# Altium PCB main_board.PcbDoc
Units mil, origin at the board's own origin, x right, y up, seen from the top; angles counter-clockwise.
Board outline 2900 x 2900 mil, 2 copper layers (Top Layer, Bottom Layer); 61 components, 47 nets, 327 pads, 28 vias.
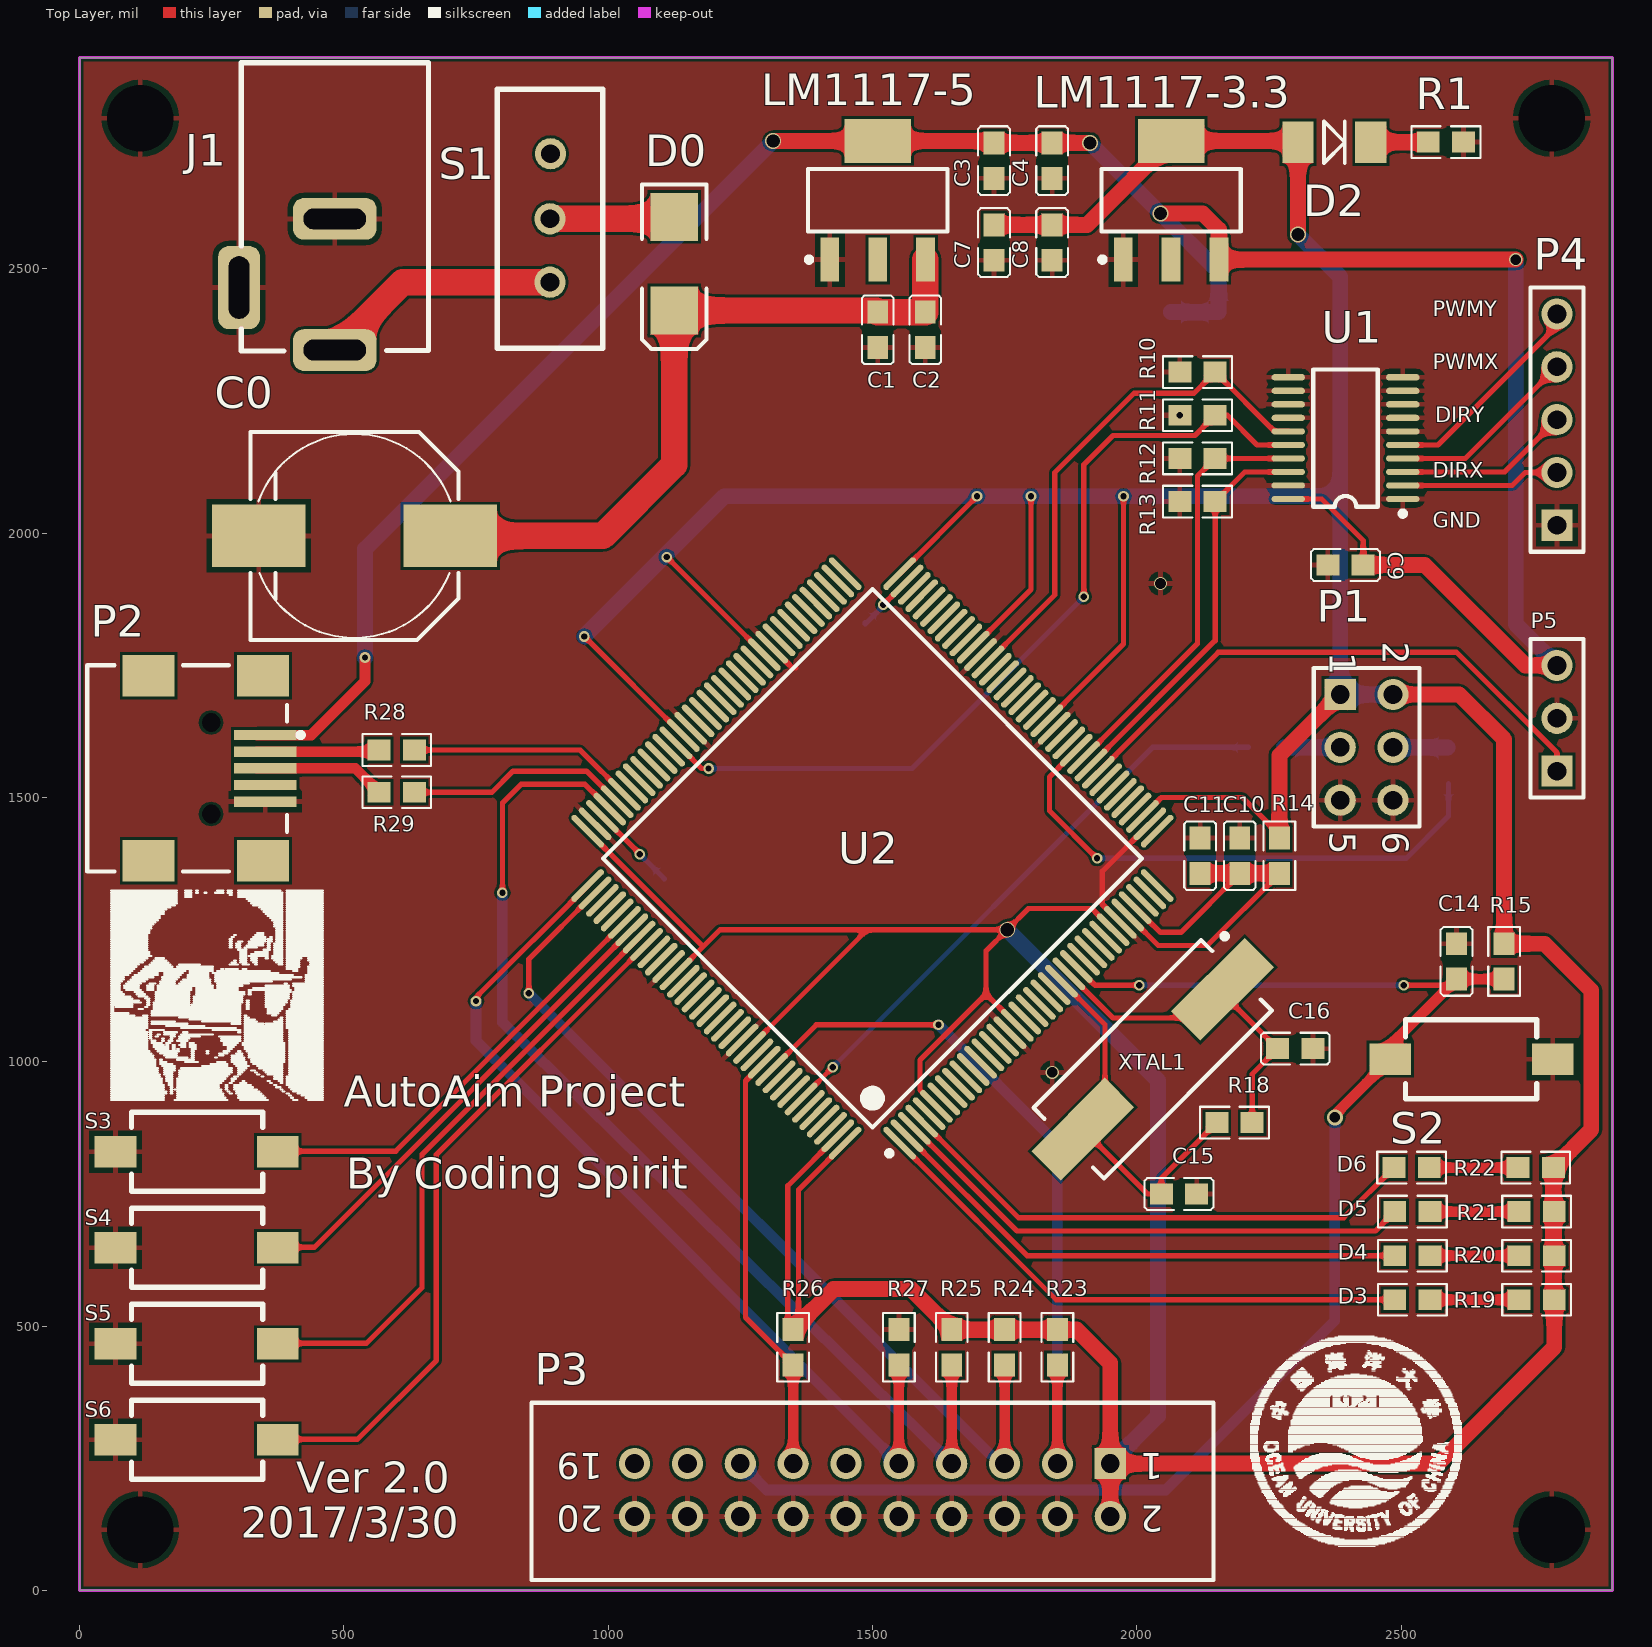
[diagram p0: Top Layer view]
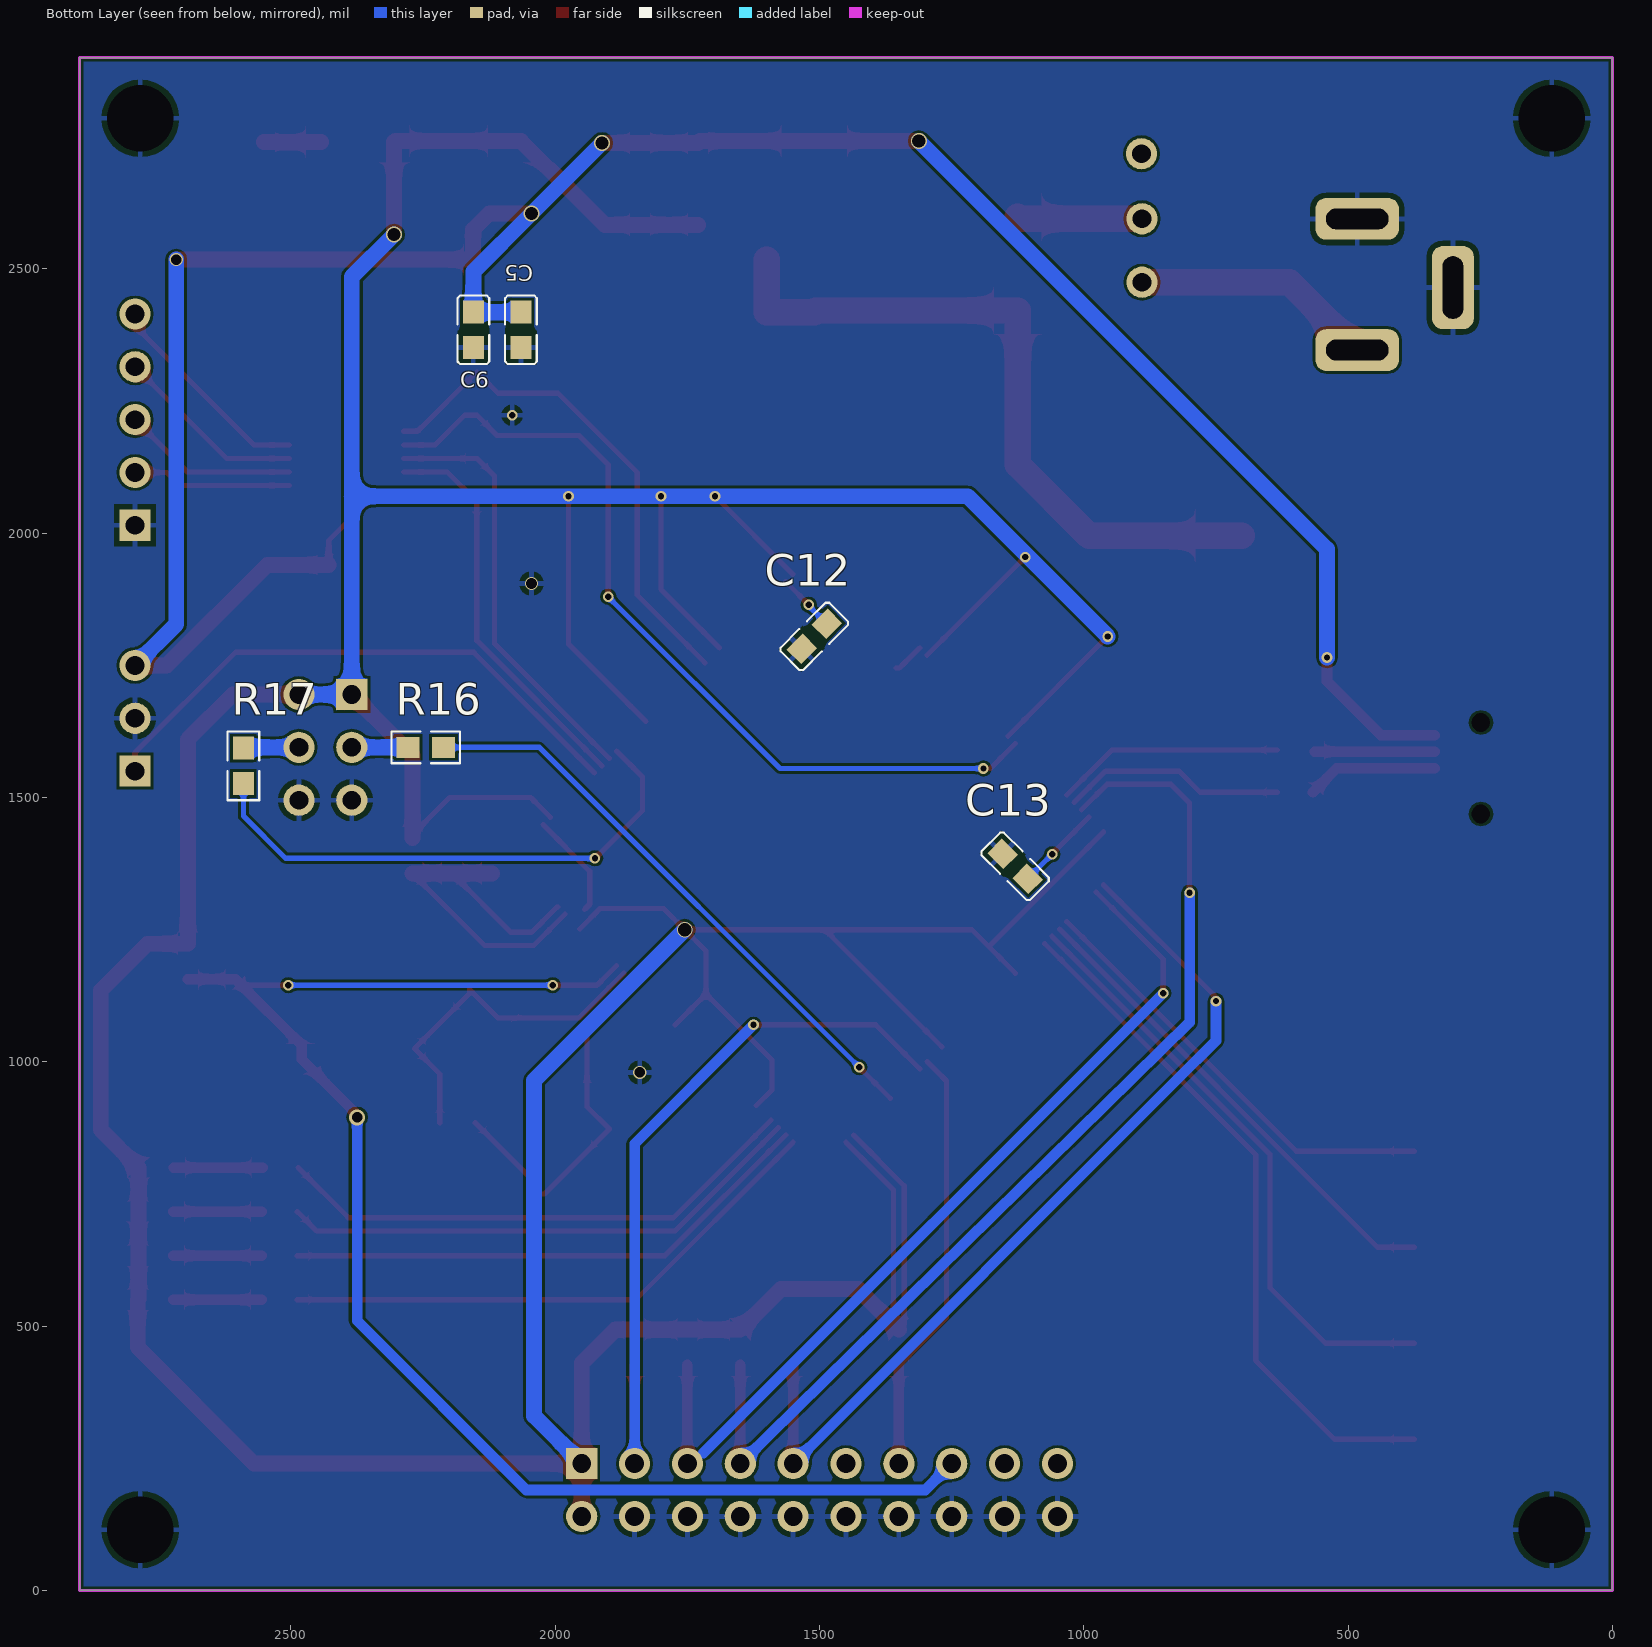
[diagram p1: Bottom Layer view, seen from below]
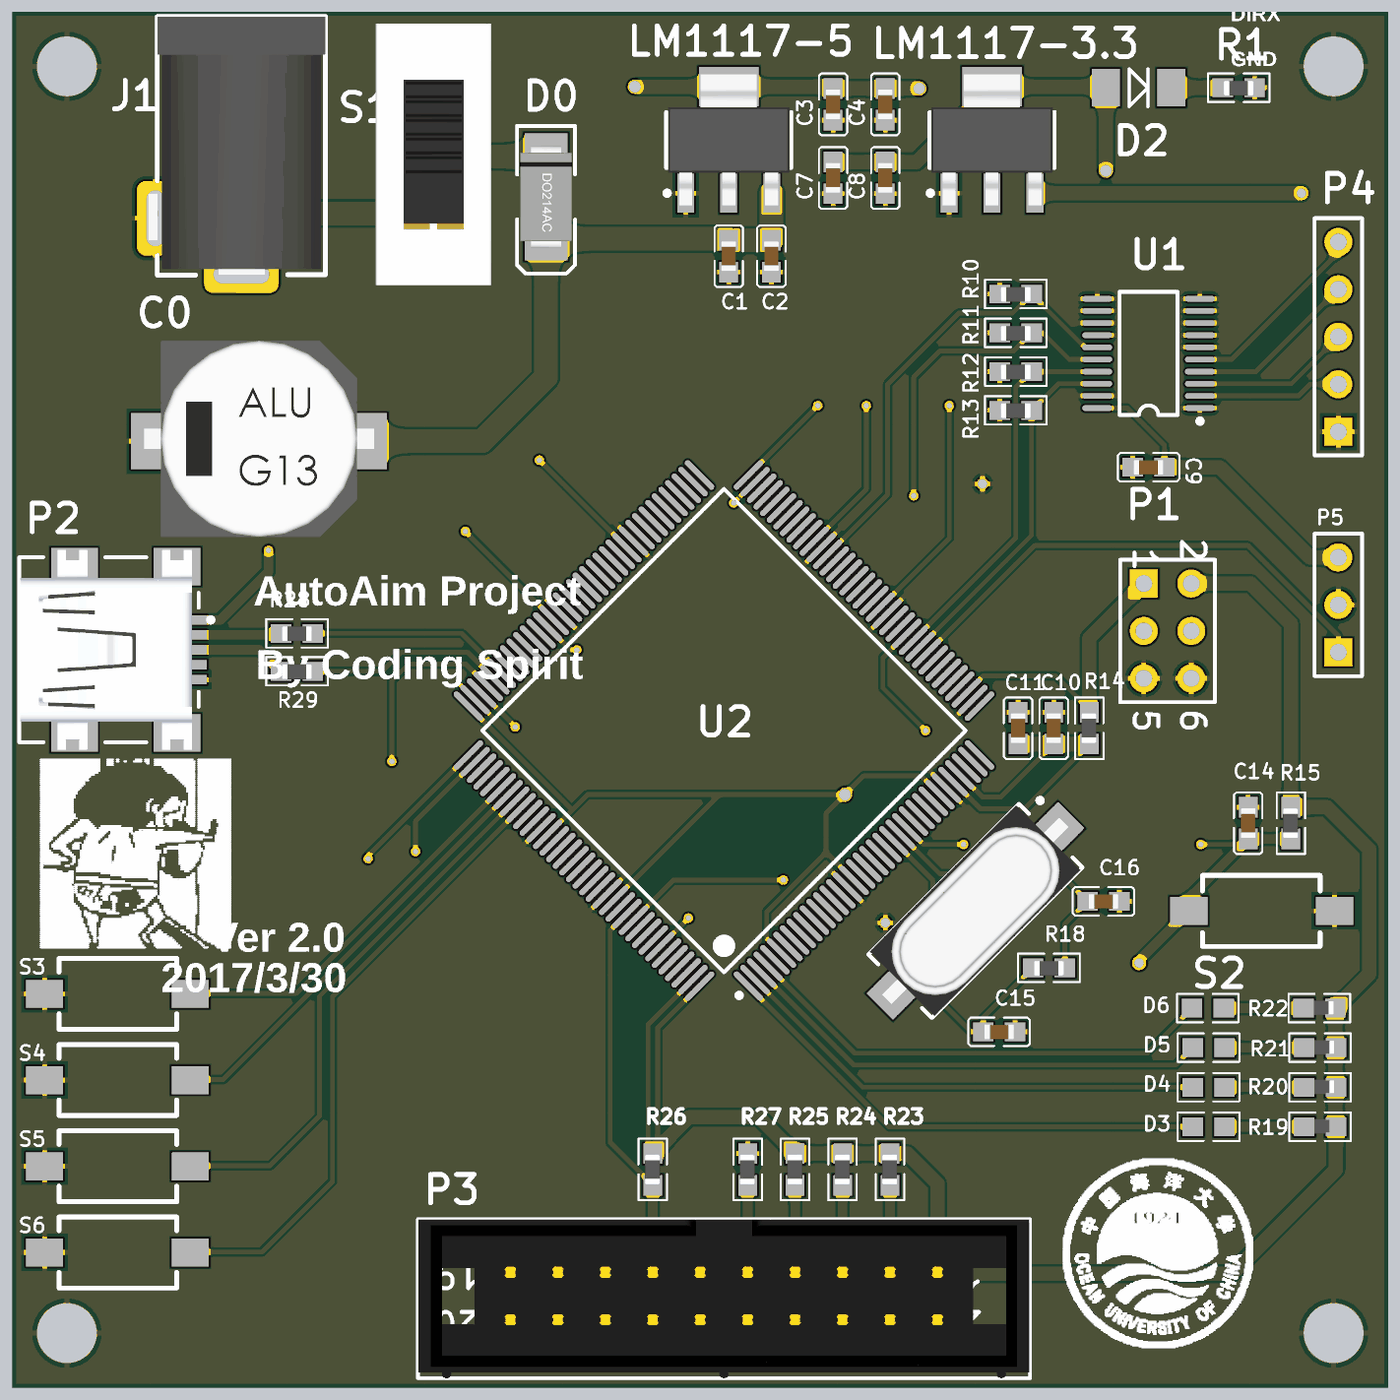
[diagram p2: 3D render of the assembled board from above, using the file's embedded part models]
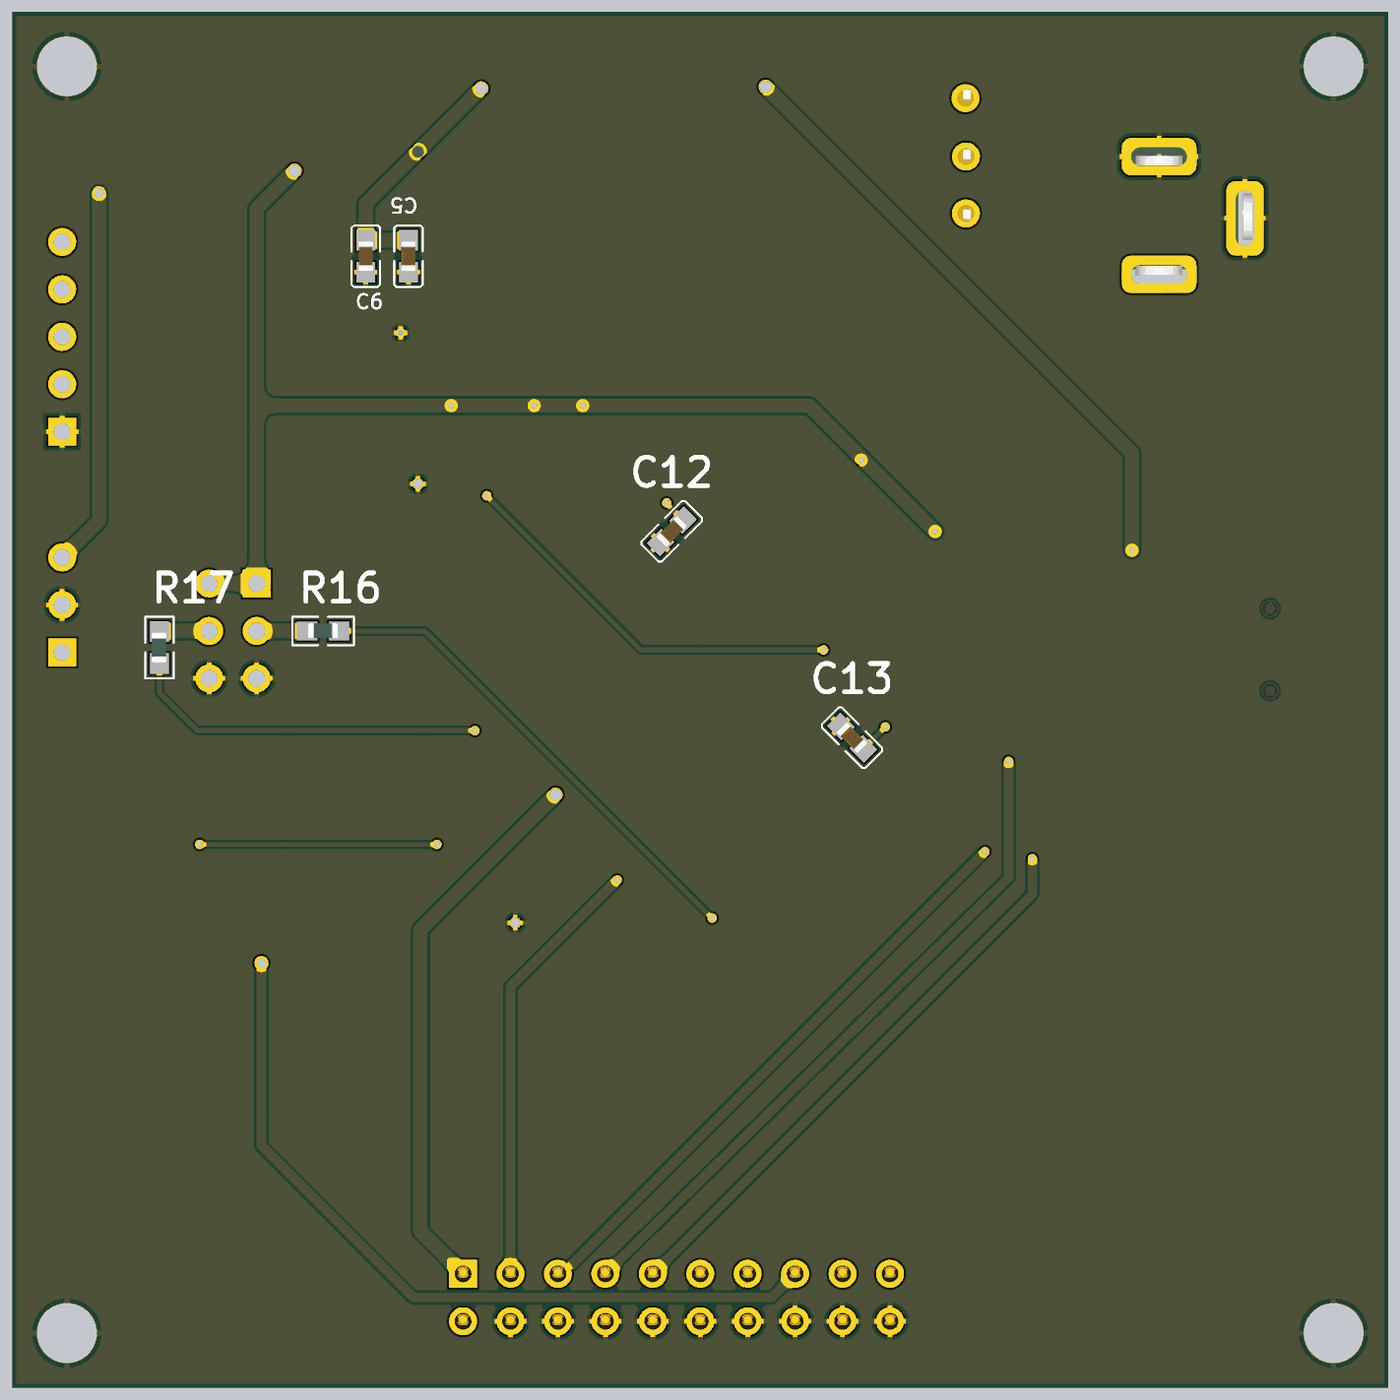
[diagram p3: 3D render of the assembled board from below, using the file's embedded part models]

## Layer stack, top to bottom
Top Solder: solder mask 0.4, Solder Resist, Dk 3.5
Top Layer: signal copper 1.4
Dielectric 1: dielectric 12.6, FR-4, Dk 4.8
Bottom Layer: signal copper 1.4
Bottom Solder: solder mask 0.4, Solder Resist, Dk 3.5

## Board outline
0,0 2900,0 2900,2900 0,2900

## Design rules (kind name [scope] priority, off if disabled: settings)
Clearance [All] p1: gap=5
HoleSize [All] p1: absolutevalues=TRUE maxlimit=150 minlimit=1 maxpercent=80.000 minpercent=20.000
MinimumSolderMaskSliver [All] p1 off: minsoldermaskwidth=5
PolygonConnect [All] p1: connectstyle=Relief reliefconductorwidth=10 reliefentries=4 polygonreliefangle="90 Angle" airgapwidth=10
RoutingVias [All] p1: holewidth=28 width=50 viastyle="Through Hole" minholewidth=12 minwidth=20 maxholewidth=28 maxwidth=50
SilkToSilkClearance [All] p1 off: silktosilkclearance=5
SilkToSolderMaskClearance [IsPad] p1 off: minsilkscreentomaskgap=1 clearancetoexposedcopper=TRUE
SolderMaskExpansion [All] p1: expansion=4
Width [All] p1: maxlimit=50 minlimit=10 preferedwidth=10
26 further rules are at their usual default settings.

## Classes and differential pairs
component class main: 0 C0 C1 C2 C3 C4 C5 C6 C7 C8 C9 C10 C11 C12 C13 C14 C15 C16 D0 D2 J1 LM1117-3.3 LM1117-5 P1 P2 R1 R10 R11 R12 R13 R14 R15 R16 R17 R18 R28 R29 S1 S2 U1 U2 XTAL1
component class other: D3 D4 D5 D6 P3 P4 P5 R21 R22 R23 R24 R25 R26 R27 R28 R29 S3 S4 S5 S6

## Components (designator, comment, footprint, x,y, rotation, side; value= is the part's Value field where it differs from the comment)
C0 "Cap Pol1" CAP-10 525,1995 r180 top
C1 "Cap" C-0603 1510,2385 r90 top
C2 "Cap" C-0603 1600,2385 r90 top
C3 "Cap" C-0603 1730,2705 r90 top
C4 "Cap" C-0603 1840,2705 r90 top
C5 "Cap" C-0603 2065,2385 r90 bottom
C6 "Cap" C-0603 2155,2385 r90 bottom
C7 "Cap" C-0603 1730,2550 r90 top
C8 "Cap" C-0603 1840,2550 r90 top
C9 "Cap" C-0603 2395,1940 r180 top
C10 "Cap" C-0603 2195,1390 r270 top
C11 "Cap" C-0603 2120,1390 r270 top
C12 "Cap" C-0603 1510,1805 r135 bottom
C13 "Cap" C-0603 1130,1370 r225 bottom
C14 "Cap" C-0603 2605,1190 r270 top
C15 "Cap" C-0603 2080,750 r0 top
C16 "Cap" C-0603 2300,1025 r0 top
D0 "Diode" DIODE-SMA/SMB 1125,2510 r270 top
D2 "LED3" DIODE-1206 2305,2740 r0 top
D3 "LED3" 0603-1 2521.54,550 r180 top
D4 "LED3" 0603-1 2521.54,633.33 r180 top
D5 "LED3" 0603-1 2521.54,716.67 r180 top
D6 "LED3" 0603-1 2520,800 r180 top
J1 "PWRCON" DC-005A 660,2890 r180 top
LM1117-3.3 "LM1117" lm1117 2065,2630 r90 top
LM1117-5 "LM1117" lm1117 1510,2630 r90 top
P1 "Header 3X2" HDR2X3 2385,1695 r270 top
P2 "USB" USB_MINI 210,1550 r180 top
P3 "JTAG" JTAG 1500,190 r180 top
P4 "Header 5" HDR1X5 2795,2015 r90 top
P5 "Header 3" HDR1X3 2795,1550 r90 top
R1 "Res2" R-0603 2585,2740 r180 top
R10 "Res2" R-0603 2115,2305 r180 top
R11 "Res2" R-0603 2115,2223.33 r180 top
R12 "Res2" R-0603 2115,2141.67 r180 top
R13 "Res2" R-0603 2115,2060 r180 top
R14 "Res2" R-0603 2270,1390 r90 top
R15 "Res2" R-0603 2695,1190 r90 top
R16 "Res2" R-0603 2245,1595 r180 bottom
R17 "Res2" R-0603 2590,1560 r90 bottom
R18 "Res2" R-0603 2185,885 r180 top
R19 "Res2" R-0603 2756.54,550 r180 top
R20 "Res2" R-0603 2756.54,633.33 r180 top
R21 "Res2" R-0603 2756.54,716.67 r180 top
R22 "Res2" R-0603 2755,800 r180 top
R23 "Res2" R-0603 1850,460 r90 top
R24 "Res2" R-0603 1750,460 r90 top
R25 "Res2" R-0603 1650,460 r90 top
R26 "Res2" R-0603 1350,460 r90 top
R27 "Res2" R-0603 1550,460 r90 top
R28 "Res2" R-0603 600,1590 r180 top
R29 "Res2" R-0603 600,1510 r180 top
S1 "SW SPDT" SW3P 890,2595 r90 top
S2 "SW-PB_1" SW-2-6*3 2635,1005 r0 top
S3 "SW-PB_1" SW-2-6*3 220,830 r180 top
S4 "SW-PB_1" SW-2-6*3 220,648.33 r180 top
S5 "SW-PB_1" SW-2-6*3 220,466.67 r180 top
S6 "SW-PB_1" SW-2-6*3 220,285 r180 top
U1 "74HCT245D" TSSOP20 2395,2180 r90 top
U2 "STM32F407ZET6" STM-LQFP144_M 1500,1385 r135 top locked
XTAL1 "XTAL" XTAL-QC49/SMD 2030,1005 r225 top

## Footprints (in the part's own frame and the unit in brackets; to place one, negate y for a bottom-side part, rotate by r counter-clockwise, add the part's x,y. Pads: shape width x height; smd on the part's side, far side on the other; paste and mask are expansions set on the pad)
0603-1 [mm] "贴片带丝印"
  rect 1.1x1 smd: 1(-0.85,0) 2(0.85,0)
  silkscreen extent -1.65,-0.76 1.65,0.76, body extent -1.14,-0.38 1.14,0.38, height 1
C-0603 [mm]
  rect 1.1x1 smd: 1(-0.85,0) 2(0.85,0)
  silkscreen extent -1.65,-0.76 1.65,0.76, body extent -0.8,-0.4 0.8,0.4, height 0.6
CAP-10 [mm]
  rect 4.5x3 smd: 1(-4.473,0) 2(4.727,0)
  silkscreen extent -4.87,-5 5.13,5, body extent -6.02,-5.38 6.28,5.12, height 14
DC-005A [mm]
  rrect50% 4x2 hole 1 slot 3 at 0 deg: 1(4.5,13.8) 2(4.5,7.5)
  rrect50% 2x4 hole 1 slot 3 at 90 deg: 3(9.1,10.8)
  silkscreen extent 0,0 9,13.84, body extent 0,0.02 9.5,13.84, height 11.02
DIODE-1206 [mm] "玻璃封装二极管"
  rect 1.5x2 smd: 1(0,0) 2(3.5,0)
  silkscreen extent 1.25,-1 2.25,1
DIODE-SMA/SMB [mm]
  rect 2.3x2.3 smd: 1(-2.25,0) 2(2.25,0)
  silkscreen extent -3.8,-1.55 4.1,1.55, body extent -2.74,-1.4 2.74,1.4, height 2.41
HDR1X3 [mm] "Connector; Header; 3 Position"
  rect 1.5x1.5 hole 0.9: 1(0,0)
  round 1.5 hole 0.9: 2(2.54,0) 3(5.08,0)
  silkscreen extent -1.27,-1.27 6.35,1.27
HDR1X5 [mm] "Connector; Header; 5 Position"
  rect 1.5x1.5 hole 0.9: 1(0,0)
  round 1.5 hole 0.9: 2(2.54,0) 3(5.08,0) 4(7.62,0) 5(10.16,0)
  silkscreen extent -1.27,-1.27 11.43,1.27
HDR2X3 [mm] "Connector; Header; 3x2 Position"
  rect 1.5x1.5 hole 0.9: 1(0,0)
  round 1.5 hole 0.9: 2(0,2.54) 3(2.54,0) 4(2.54,2.54) 5(5.08,0) 6(5.08,2.54)
  silkscreen extent -1.27,-1.27 6.35,3.81
JTAG [mm]
  rect 1.5x1.5 hole 0.9: 1(-11.43,-1.27)
  round 1.5 hole 0.9: 2(-11.43,1.27) 3(-8.89,-1.27) 4(-8.89,1.27) 5(-6.35,-1.27) 6(-6.35,1.27) 7(-3.81,-1.27) 8(-3.81,1.27) 9(-1.27,-1.27) 10(-1.27,1.27) 11(1.27,-1.27) 12(1.27,1.27) 13(3.81,-1.27) 14(3.81,1.27) 15(6.35,-1.27) 16(6.35,1.27) 17(8.89,-1.27) 18(8.89,1.27) 19(11.43,-1.27) 20(11.43,1.27)
  silkscreen extent -16.38,-4.19 16.38,4.32, body extent -16.35,-4.18 16.35,4.32, height 8.64
lm1117 [mm]
  rect 2.1x0.9 smd: 1(-2.85,2.3) 2(-2.85,0) 3(-2.85,-2.3)
  rect 2.1x3.2 smd: 4(2.85,0)
  silkscreen extent -2.97,-3.35 1.5,3.42, body extent -3.5,-3.25 3.5,3.25, height 1.65
R-0603 [mm]
  rect 1.1x1 smd: 1(-0.85,0) 2(0.85,0)
  silkscreen extent -1.65,-0.76 1.65,0.76, body extent -0.8,-0.38 0.8,0.42, height 0.38
STM-LQFP144_M [mm] "Thin QFP, 144-Leads, Body 20x20mm, Pitch 0.5mm, IPC Low Density"
  oval 2.1x0.3 smd: 1(-10.6,8.75) 2(-10.6,8.25) 3(-10.6,7.75) 4(-10.6,7.25) 5(-10.6,6.75) 6(-10.6,6.25) 7(-10.6,5.75) 8(-10.6,5.25) 9(-10.6,4.75) 10(-10.6,4.25) 11(-10.6,3.75) 12(-10.6,3.25) 13(-10.6,2.75) 14(-10.6,2.25) 15(-10.6,1.75) 16(-10.6,1.25) 17(-10.6,0.75) 18(-10.6,0.25) 19(-10.6,-0.25) 20(-10.6,-0.75) 21(-10.6,-1.25) 22(-10.6,-1.75) 23(-10.6,-2.25) 24(-10.6,-2.75) 25(-10.6,-3.25) 26(-10.6,-3.75) 27(-10.6,-4.25) 28(-10.6,-4.75) 29(-10.6,-5.25) 30(-10.6,-5.75) 31(-10.6,-6.25) 32(-10.6,-6.75) 33(-10.6,-7.25) 34(-10.6,-7.75) 35(-10.6,-8.25) 36(-10.6,-8.75) 73(10.6,-8.75) 74(10.6,-8.25) 75(10.6,-7.75) 76(10.6,-7.25) 77(10.6,-6.75) 78(10.6,-6.25) 79(10.6,-5.75) 80(10.6,-5.25) 81(10.6,-4.75) 82(10.6,-4.25) 83(10.6,-3.75) 84(10.6,-3.25) 85(10.6,-2.75) 86(10.6,-2.25) 87(10.6,-1.75) 88(10.6,-1.25) 89(10.6,-0.75) 90(10.6,-0.25) 91(10.6,0.25) 92(10.6,0.75) 93(10.6,1.25) 94(10.6,1.75) 95(10.6,2.25) 96(10.6,2.75) 97(10.6,3.25) 98(10.6,3.75) 99(10.6,4.25) 100(10.6,4.75) 101(10.6,5.25) 102(10.6,5.75) 103(10.6,6.25) 104(10.6,6.75) 105(10.6,7.25) 106(10.6,7.75) 107(10.6,8.25) 108(10.6,8.75)
  oval 0.3x2.1 smd: 37(-8.75,-10.6) 38(-8.25,-10.6) 39(-7.75,-10.6) 40(-7.25,-10.6) 41(-6.75,-10.6) 42(-6.25,-10.6) 43(-5.75,-10.6) 44(-5.25,-10.6) 45(-4.75,-10.6) 46(-4.25,-10.6) 47(-3.75,-10.6) 48(-3.25,-10.6) 49(-2.75,-10.6) 50(-2.25,-10.6) 51(-1.75,-10.6) 52(-1.25,-10.6) 53(-0.75,-10.6) 54(-0.25,-10.6) 55(0.25,-10.6) 56(0.75,-10.6) 57(1.25,-10.6) 58(1.75,-10.6) 59(2.25,-10.6) 60(2.75,-10.6) 61(3.25,-10.6) 62(3.75,-10.6) 63(4.25,-10.6) 64(4.75,-10.6) 65(5.25,-10.6) 66(5.75,-10.6) 67(6.25,-10.6) 68(6.75,-10.6) 69(7.25,-10.6) 70(7.75,-10.6) 71(8.25,-10.6) 72(8.75,-10.6) 109(8.75,10.6) 110(8.25,10.6) 111(7.75,10.6) 112(7.25,10.6) 113(6.75,10.6) 114(6.25,10.6) 115(5.75,10.6) 116(5.25,10.6) 117(4.75,10.6) 118(4.25,10.6) 119(3.75,10.6) 120(3.25,10.6) 121(2.75,10.6) 122(2.25,10.6) 123(1.75,10.6) 124(1.25,10.6) 125(0.75,10.6) 126(0.25,10.6) 127(-0.25,10.6) 128(-0.75,10.6) 129(-1.25,10.6) 130(-1.75,10.6) 131(-2.25,10.6) 132(-2.75,10.6) 133(-3.25,10.6) 134(-3.75,10.6) 135(-4.25,10.6) 136(-4.75,10.6) 137(-5.25,10.6) 138(-5.75,10.6) 139(-6.25,10.6) 140(-6.75,10.6) 141(-7.25,10.6) 142(-7.75,10.6) 143(-8.25,10.6) 144(-8.75,10.6)
  silkscreen extent -10.72,-9.15 9.15,9.57, body extent -10,-10 10,10, height 1.6
SW3P [mm]
  round 1.5 hole 0.9: 1(-3.048,0) 2(0,0) 3(3.124,-0.025)
  silkscreen extent -6.22,-2.54 6.22,2.54, body extent -6.89,-3.05 7.11,3.15, height 9.65
SW-2-6*3 [mm]
  rect 2x1.5 smd: 1(-3.937,0) 2(3.863,0)
  silkscreen extent -3.21,-1.9 3.09,1.9, body extent -4,-1.94 3.89,1.91, height 2.5
TSSOP20 [mm] "Shrink Small Outline; 20 Leads; Body Width 4.4 mm; Pitch 0.65 mm"
  oval 0.3x1.6 smd: 1(-2.925,-2.75) 2(-2.275,-2.75) 3(-1.625,-2.75) 4(-0.975,-2.75) 5(-0.325,-2.75) 6(0.325,-2.75) 7(0.975,-2.75) 8(1.625,-2.75) 9(2.275,-2.75) 10(2.925,-2.75) 11(2.925,2.75) 12(2.275,2.75) 13(1.625,2.75) 14(0.975,2.75) 15(0.325,2.75) 16(-0.325,2.75) 17(-0.975,2.75) 18(-1.625,2.75) 19(-2.275,2.75) 20(-2.925,2.75)
  silkscreen extent -3.75,-2.87 3.3,1.55, body extent -3.3,-1.91 3.3,1.91, height 1.1
USB_MINI [mm]
  rect 3x0.5 smd: 1(-3.588,-1.735) 2(-3.588,-0.935) 3(-3.588,-0.135) 4(-3.588,0.665) 5(-3.588,1.465)
  rect 2.5x2 smd: 6(-3.488,4.315) 7(2.012,4.315) 8(-3.488,-4.585) 9(2.012,-4.585)
  round 0.6 hole 0.9 unplated: MH1(-0.988,2.065) MH2(-0.988,-2.335)
  silkscreen extent -5.41,-5.09 4.96,4.81, body extent -4.29,-5.49 4.91,5.21, height 3.95
XTAL-QC49/SMD [mm]
  rect 5x2 smd: 1(-4.75,0) 2(4.75,0)
  silkscreen extent -6.75,-2.4 5.7,2.4, body extent -6.7,-2.46 6.7,2.44, height 4

## Part data
C0: "Polarized Capacitor (Radial)"
C1 C2 C3 C4 C5 C6 C7 C8 C9 C10 C11 C12 C13 C14 C15 C16: library part "Cap Semi", "Capacitor (Semiconductor SIM Model)"
D0: "Default Diode"
D2 D3 D4 D5 D6: "Typical BLUE SiC LED"
J1: "直流电源端子"
P1: "Header, 3-Pin, Dual row"
P4: "Header, 5-Pin"
P5: "Header, 3-Pin"
R1 R10 R11 R12 R13 R14 R15 R16 R17 R18 R19 R20 R21 R22 R23 R24 R25 R26 R27 R28 R29: "Resistor"
S2 S3 S4 S5 S6: "Switch"
U1: library part 74lvc245
U2: "ARM Cortex-M4 32-bit MCU+FPU, 210 DMIPS, 512 kB Flash, 192 kB Internal RAM, 114 I/Os, 144-pin LQFP, -40 to 85 degC, Tray"

## Free pads (board coordinates)
  round 60 hole 125.98: 0(115,115) 1(115,2785) 2(2785,2785) 3(2785,115)

## Via types
v1: diameter 20, hole 12, Top Layer to Bottom Layer, 19 vias
v2: diameter 30, hole 25, Top Layer to Bottom Layer, 5 vias
v3: diameter 25, hole 20, Top Layer to Bottom Layer, 3 vias
v4: diameter 30, hole 20, Top Layer to Bottom Layer, 1 vias

## Nets (pads, with @x,y where several pads share a name; then routed paths per layer and width w, separated by ;. In a path a pad name is that pad's centre, name@x,y a point inside that pad or via, vN(x,y) a via of type N, cw(c..) or ccw(c..) an arc to the next point about the centre after c; other vN are vias at no path point)
3.3V: C7.2 C8.2 D2.1 LM1117-3.3.4 P1.1 P1.2 P3.1 P3.2 R14.2 R15.2 R19.1 R20.1 R21.1 R22.1 R23.2 R24.2 R25.2 R26.2 U2.6 U2.17 U2.30 U2.39 U2.52 U2.62 U2.72 U2.84 U2.95 U2.108 U2.121 U2.131 U2.143 U2.144 | length 12946.7
  Top Layer w10: v1(955,1804.73) U2.95@1143.66,1616.06 ; U2.108@962.71,1435.11 1179.71,1218.11 1180,1218.11 ; v1(1110.95,1955) U2.84@1296.78,1769.18 ; U2.121@1129.74,1167.86 1180,1218.11 ; U2.131@1268.94,1028.66 1490.27,1250 ; R26.2 1340,503.47 1340,765.66 U2.143@1435.97,861.63 ; R26.2@1360,503.46 1360,757.82 U2.144@1449.89,847.71 ; U2.72@1550.11,1922.29 v1(1697.82,2070) ; U2.6@1619.71,917.31 1590,947.01 1590,1003.24 1715,1128.24 ; U2.62@1689.3,1783.1 1800,1893.79 v1(1800,2070) ; U2.17@1772.82,1070.42 1715,1128.24 ; U2.52@1828.5,1643.9 1975,1790.4 v1(1975,2070) ; U2.30@1953.77,1251.37 1915.15,1290 1795,1290 v2(1755,1250) ; U2.39@2009.45,1462.95 2046.5,1500 2200,1500 R14.2@2270,1430 ; 1180,1218.11 1211.89,1250 1490.27,1250 ; 1490.27,1250 v2(1755,1250) ; 1715,1128.24 1715,1210 v2(1755,1250)
  Top Layer w30: R26.2 R26.2@1360,503.46 ; R26.2@1365,508.46 1426.54,570 1573.47,570 R25.2 R24.2 R23.2 1886.54,493.46 1950,430 P3.1 ; C7.2 C8.2 1906.26,2583.47 LM1117-3.3.4 2302.8,2742.2 D2.1 v2(2305,2565) ; P3.2 P3.1 ; R14.2 2270,1430 2270,1580 P1.1 ; P1.2 2610,1695 2695,1610 R15.2 2771.54,1223.46 2860,1135 2860,871.53 R22.1 R19.1@2788.46,551.54 ; R19.1 2790,460 2570,240 P3.1
  Bottom Layer w30: v1@955,1805 1220,2070 v1(1800,2070) v1(1975,2070) 2385,2070 ; v2(1755,1250) 2040,965 2040,330 P3.1 ; v2(2305,2565) 2385,2485 2385,2070 ; P1.2 P1.1 2385,2070
5V: C3.2 C4.2 C5.2 C6.2 C9.1 LM1117-3.3.3 LM1117-5.4 P2.1 P5.3 U1.20 | length 4907.1
  Top Layer w10: U1.20 2350.16,2064.84 2428.46,1986.54 C9.1
  Top Layer w20: P2.1@336.26,1618.31 438.31,1618.31 540,1720 v1(540,1765)
  Top Layer w30: v2(1312.21,2742.2) LM1117-5.4 1726.26,2742.2 C3.2 C4.2 v2(1911.54,2738.47) ; v2(2045,2605) 2125,2605 2155.55,2574.45 LM1117-3.3.3 v3(2717.2,2517.8) ; C9.1 2545,1940 2735,1750 P5.3
  Bottom Layer w30: v1(540,1765) 540,1970 v2(1312.21,2742.2) ; v2(1911.54,2738.47) v2(2045,2605) 2155,2495 C6.2 C5.2 ; v3(2717.2,2517.8) 2717.2,1827.8 P5.3
12V: C0.1 C1.2 C2.2 D0.2 LM1117-5.3 | length 1347
  Top Layer w30: LM1117-5.3@1600,2517.24 LM1117-5.3
  Top Layer w50: C0.1 990,1995 1125,2130 D0.2 1507.05,2421.42 C1.2 C2.2 LM1117-5.3@1600,2517.24
BOOT0: R16.2 U2.138 | length 1120.1
  Top Layer w10: U2.138@1366.37,931.23 v1(1425,989.85)
  Bottom Layer w10: v1(1425,989.85) 2030.15,1595 R16.2
BOOT1: R17.1 U2.48 | length 1020.5
  Top Layer w10: U2.48@1884.18,1588.22 1835,1539.05 1835,1475 v1(1925,1385)
  Bottom Layer w10: v1(1925,1385) 2510,1385 2590,1465 R17.1
DIR1: P4.2 U1.2 | length 301.9
  Top Layer w10: U1.2 2710.43,2090.43 2735,2115 P4.2
DIR2: P4.3 U1.3 | length 332.7
  Top Layer w10: U1.3 2696.02,2116.02 P4.3
DIRX: R13.1 U1.18 U2.46 | length 759
  Top Layer w10: U2.46@1912.02,1560.38 2148.46,1796.83 R13.1 2204.49,2116.02 U1.18
DIRY: R12.1 U1.17 U2.47 | length 809.3
  Top Layer w10: U2.47@1898.1,1574.31 2115,1791.21 2115,2108.2 R12.1 U1.17@2286.68,2141.67
FIRE: P5.1 U2.45 | length 1077.4
  Top Layer w10: U2.45@1925.93,1546.47 2154.47,1775 2605,1775 2795,1585 P5.1
GND: C0.2 C1.1 C2.1 C3.1 C4.1 C5.1 C6.1 C7.1 C8.1 C9.2 C10.1 C11.1 C12.1 C13.1 C14.1 C15.2 C16.2 J1.2 J1.3 LM1117-3.3.1 LM1117-5.1 P1.5 P1.6 P2.5 P3.4 P3.6 P3.8 P3.10 P3.12 P3.14 P3.16 P3.18 P3.20 P4.1 P5.2 pad.0 pad.1 pad.2 pad.3 R1.1 R10.2 R11.2 R12.2 R13.2 R27.2 S2.2 S3.2 S4.2 S5.2 S6.2 U1.1 U1.6 U1.7 U1.8 U1.9 U1.10 U1.11 U1.12 U1.13 U1.14 U1.19 U2.16 U2.31 U2.38 U2.51 U2.61 U2.83 U2.94 U2.107 U2.120 U2.130 | length 261.6
  Top Layer w10: U2.83@1310.7,1783.1 1348.79,1745 1355,1745 ; U2.31@1944.83,1288.16 1935,1297.99 1935,1360.66 U2.38@2023.37,1449.03
  other v1: 2081.53,2223.33
  other v3: 1840,980 2045,1905
JTCK: P3.9 R27.1 U2.109 | length 1700.9
  Top Layer w10: v1(750,1115) 750,1122.18 U2.109@962.71,1334.89
  Top Layer w20: P3.9 R27.1
  Bottom Layer w20: v1(750,1115) 750,1040 825,965 P3.9
JTDI: P3.5 R24.1 U2.110 | length 1660.3
  Top Layer w10: v1(850,1130) 850,1194.34 U2.110@976.63,1320.97
  Top Layer w20: P3.5 R24.1
  Bottom Layer w20: v1(850,1130) 1720,260
JTDO: P3.13 R26.1 U2.133 | length 813.3
  Top Layer w10: U2.133@1296.78,1000.83 1260,964.05 1260,516.54 R26.1
  Top Layer w20: P3.13 R26.1
JTMS: P3.7 R25.1 U2.105 | length 2032.1
  Top Layer w10: v1(800,1320) 800,1490 835,1525 956.34,1525 U2.105@1004.47,1476.87
  Top Layer w20: P3.7 R25.1
  Bottom Layer w20: v1(800,1320) 800,1074.69 800.23,1074.46 P3.7
JTRST: P3.3 R23.1 U2.134 | length 1458.5
  Top Layer w10: U2.134@1310.69,986.9 1393.79,1070 v1(1625,1070)
  Top Layer w20: P3.3 R23.1
  Bottom Layer w20: v1(1625,1070) 1850,845 P3.3
KEY1: S3.1 U2.114 | length 837.2
  Top Layer w10: S3.1@375,830.95 597.96,830.95 U2.114@1032.31,1265.29
KEY2: S4.1 U2.115 | length 920.6
  Top Layer w10: S4.1@375,649.28 444.13,649.28 U2.115@1046.23,1251.37
KEY3: S5.1 U2.116 | length 1151.8
  Top Layer w10: S5.1@375,467.61 542.61,467.61 647.69,572.69 647.69,825 U2.116@1060.15,1237.45
KEY4: S6.1 U2.117 | length 1315.6
  Top Layer w10: S6.1@375,285.95 525.95,285.95 675,435 675,824.47 U2.117@1074.07,1223.53
LED1: D3.2 U2.1 | length 1061.3
  Top Layer w10: U2.1@1550.11,847.71 1847.82,550 D3.2
LED2: D4.2 U2.2 | length 1018.6
  Top Layer w10: U2.2@1564.03,861.63 1792.32,633.33 D4.2
LED3: D5.2 U2.3 | length 1006.3
  Top Layer w10: U2.3@1577.95,875.55 1773.5,680 2451.4,680 D5.2
LED4: D6.2 U2.4 | length 1010.4
  Top Layer w10: U2.4@1591.87,889.47 1776.34,705 2391.54,705 D6.2
NetC12_2: C12.2 U2.71 | length 114.6
  Top Layer w10: v1(1520.66,1865) U2.71@1564.03,1908.37
  Bottom Layer w10: C12.2@1486.34,1831.34 C12.2 1520.66,1862.98 v1(1520.66,1865)
NetC13_2: C13.2 U2.106 | length 164.6
  Top Layer w10: U2.106@990.55,1462.95 1060,1393.5 v1(1060,1392.67)
  Bottom Layer w10: v1(1060,1392.67) C13.2
NetC15_1: C15.1 R18.2 U2.23 XTAL1.2 | length 711.4
  Top Layer w10: U2.23@1856.34,1153.94 1940,1070.27 1940,915 XTAL1.2 2020.54,750 C15.1 2046.53,780 R18.2
NetC16_1: C16.1 R18.1 U2.24 XTAL1.1 | length 664.8
  Top Layer w10: U2.24@1870.26,1167.86 1955,1083.11 2108.11,1083.11 XTAL1.1 2162.23,1129.3 C16.1 2218.47,976.93 R18.1
NetD0_1: D0.1 S1.2 | length 236.5
  Top Layer w50: S1.2 1121.42,2595 D0.1
NetD2_2: D2.2 R1.2 | length 108.7
  Top Layer w30: D2.2 R1.2
NetD3_1: D3.1 R19.2 | length 168.1
  Top Layer w20: D3.1 R19.2
NetD4_1: D4.1 R20.2 | length 168.1
  Top Layer w20: D4.1 R20.2
NetD5_1: D5.1 R21.2 | length 168.1
  Top Layer w20: D5.1 R21.2
NetD6_1: D6.1 R22.2 | length 168.1
  Top Layer w20: D6.1 R22.2
NetJ1_1: J1.1 S1.1 | length 460.3
  Top Layer w50: J1.1 611.14,2475 S1.1
NetP1_3: P1.3 R16.1 | length 106.5
  Bottom Layer w30: R16.1 P1.3
NetP1_4: P1.4 R17.2 | length 103.5
  Bottom Layer w30: P1.4 R17.2@2588.46,1595
NetP2_2: P2.2 R28.2 | length 227.1
  Top Layer w20: P2.2@336.26,1586.81 R28.2@563.35,1586.81
NetP2_3: P2.3 R29.2 | length 249
  Top Layer w20: P2.3@336.26,1555.32 521.22,1555.32 R29.2
PWM1: P4.4 U1.4 | length 363.6
  Top Layer w10: U1.4 2621.61,2141.61 P4.4
PWM2: P4.5 U1.5 | length 407.7
  Top Layer w10: U1.5 2570,2167.2 2795,2392.21 P4.5
PWMX: R11.1 U1.16 U2.96 | length 1623
  Top Layer w10: U2.96@1129.74,1602.14 1176.89,1555 v1(1190,1555) ; v1(1900,1880) 1900,2130 1955,2185 2110.13,2185 R11.1 2171.67,2223.33 2227.8,2167.2 U1.16
  Bottom Layer w10: v1(1190,1555) 1575,1555 v1(1900,1880)
PWMY: R10.1 U1.15 U2.60 | length 979.6
  Top Layer w10: U2.60@1717.14,1755.26 1845,1883.11 1845,2115 1995,2265 2108.47,2265 R10.1 2260.67,2192.8 U1.15
RESET: C14.2 P3.15 R15.1 S2.1 U2.25 | length 2855.9
  Top Layer w10: U2.25@1884.18,1181.78 1920.95,1145 v1(2005,1145) ; v1(2505,1145) 2593.46,1145 C14.2 ; R15.1 R15.1@2700,1156.54
  Top Layer w20: v4(2375,895) 2375,900 S2.1 2480,1031.54 C14.2 R15.1
  Bottom Layer w10: v1(2005,1145) v1(2505,1145)
  Bottom Layer w20: P3.15 1300,190 2055,190 2375,510 v4(2375,895)
USB_D+: R29.1 U2.104 | length 426
  Top Layer w10: R29.1 780,1510 820,1550 959.18,1550 U2.104@1018.39,1490.79
USB_D-: R28.1 U2.103 | length 434.2
  Top Layer w10: R28.1 947.01,1590 U2.103@1032.31,1504.71
VDDA: C10.2 C11.2 R14.1 U2.32 U2.33 | length 785.1
  Top Layer w10: U2.32@1981.61,1279.21 2040.83,1220 2133.46,1220 R14.1 ; U2.33@1995.53,1293.13 1996.87,1293.13 2045,1245 2083.46,1245 C10.2
  Top Layer w30: C11.2 R14.1
pads on no net: LM1117-3.3.2 LM1117-5.2 P2.4 P2.6 P2.7 P2.8 P2.9 P2.MH1 P2.MH2 P3.11 P3.17 P3.19 S1.3 U2.5 U2.7 U2.8 U2.9 U2.10 U2.11 U2.12 U2.13 U2.14 U2.15 U2.18 U2.19 U2.20 U2.21 U2.22 U2.26 U2.27 U2.28 U2.29 U2.34 U2.35 U2.36 U2.37 U2.40 U2.41 U2.42 U2.43 U2.44 U2.49 U2.50 U2.53 U2.54 U2.55 U2.56 U2.57 U2.58 U2.59 U2.63 U2.64 U2.65 U2.66 U2.67 U2.68 U2.69 U2.70 U2.73 U2.74 U2.75 U2.76 U2.77 U2.78 U2.79 U2.80 U2.81 U2.82 U2.85 U2.86 U2.87 U2.88 U2.89 U2.90 U2.91 U2.92 U2.93 U2.97 U2.98 U2.99 U2.100 U2.101 U2.102 U2.111 U2.112 U2.113 U2.118 U2.119 U2.122 U2.123 U2.124 U2.125 U2.126 U2.127 U2.128 U2.129 U2.132 U2.135 U2.136 U2.137 U2.139 U2.140 U2.141 U2.142

## Polygon pours and split planes (outlines as drawn)
GND on Bottom Layer "Buttom Layer-GND" (solid, remove dead copper, pour order 2): 0,2900 2900,2900 2900,0 0,0 0,2900
GND on Top Layer "Top Layer-GND" (solid, remove dead copper, pour order 4): 0,2900 2900,2900 2900,0 0,0

## Keep-outs
Keep-Out Layer:
  the board outline again, w5.91

## Silkscreen, mask and mechanical layers (free items; w line width, h text height)
Top Overlay:
  drawing of 1751 lines, arcs and shapes, not listed
  text "PWMY" at 2560,2400 h50
  text "PWMX" at 2560,2300 h50
  text "DIRY" at 2565,2200 h50
  text "DIRX" at 2560,2095 h50
  text "GND" at 2560,2000 h50
  text "AutoAim Project" at 500,895 h100
  text "By Coding Spirit" at 505,740 h100
  text "Ver 2.0" at 410,165 h100
  text "2017/3/30" at 305,80 h100

## Text inside footprints (layer, text, board x,y; h text height)
P1: Top Overlay "6" at 2465,1435 h50 r270; Top Overlay "5" at 2365,1435 h50 r270; Top Overlay "2" at 2465,1795 h50 r270; Top Overlay "1" at 2365,1775 h50 r270
P2: Mechanical 1 "PCB Edge" at 25.19,1714.23 h9.84 r270
P3: Top Overlay "20" at 990,160 h50 r180; Top Overlay "19" at 990,260 h50 r180; Top Overlay "1" at 2050,260 h50 r180; Top Overlay "2" at 2050,160 h50 r180